# Altium PCB MC_Project.PcbDoc
Units mm, origin at the board's own origin, x right, y up, seen from the top; angles counter-clockwise.
Board outline 36.07 x 40.64 mm, 2 copper layers (Top Layer, Bottom Layer); 32 components, 44 nets, 160 pads, 46 vias.
Unrouted connection lines stored in the file: 19.
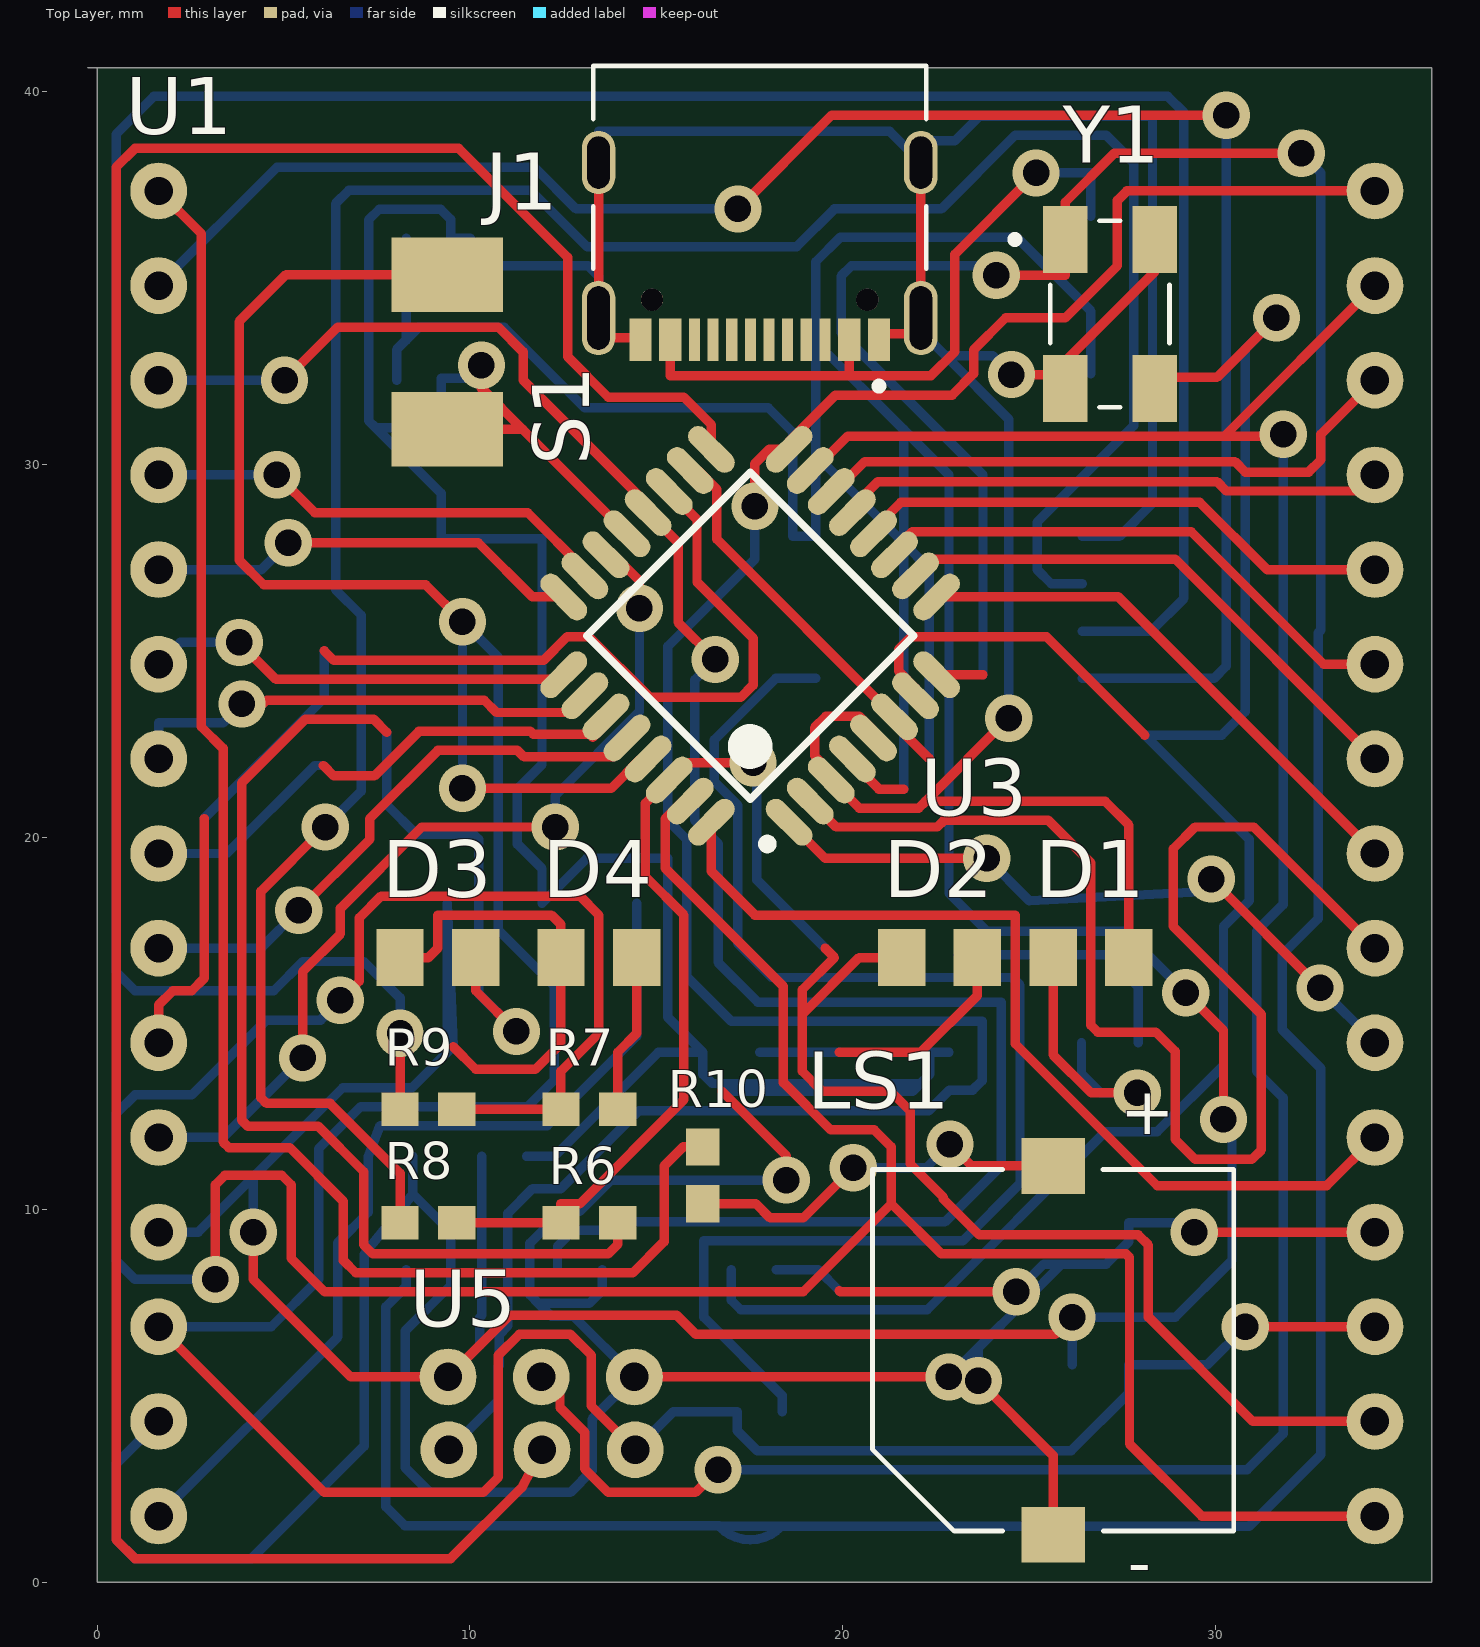
[diagram p0: Top Layer view]
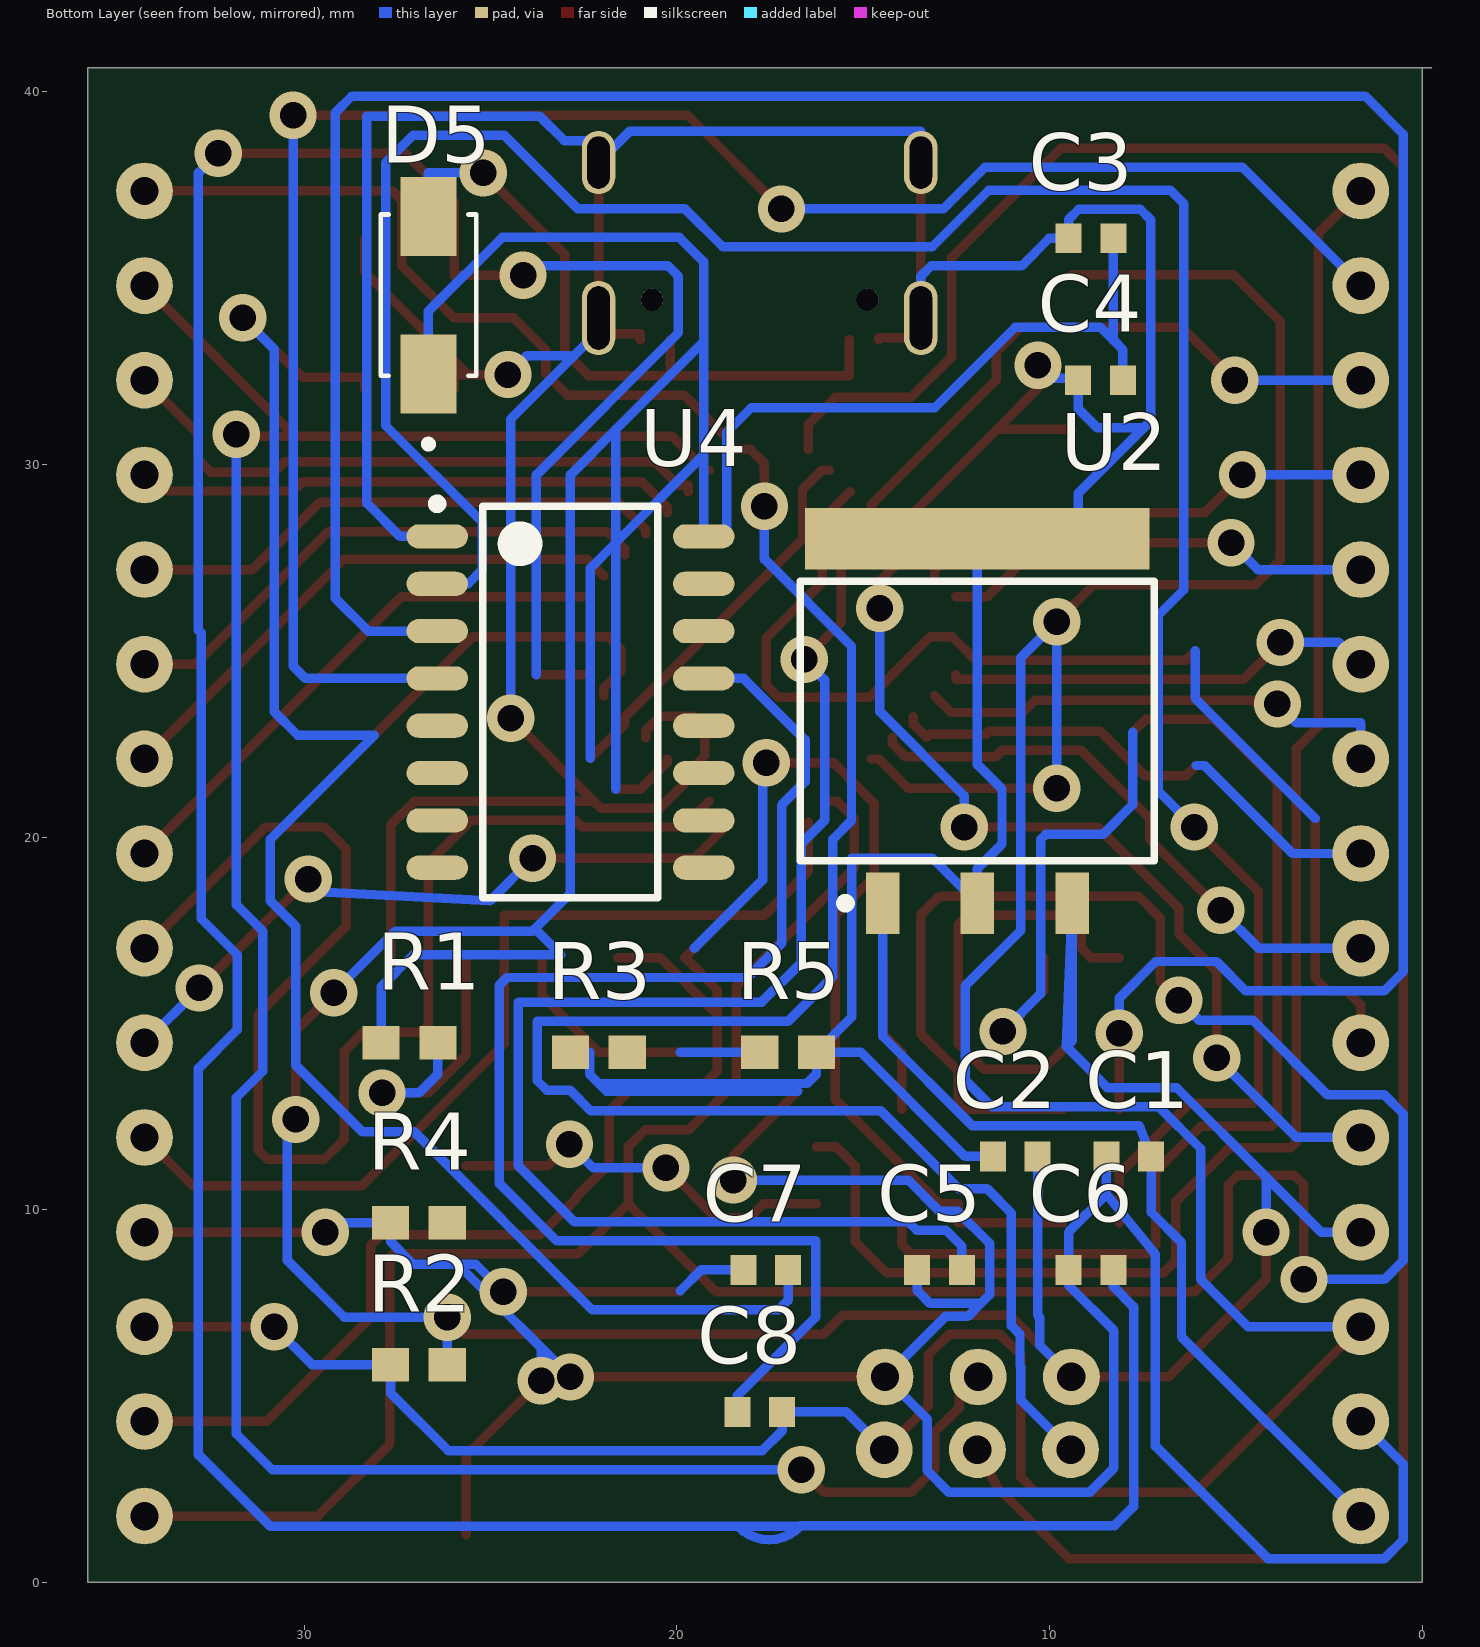
[diagram p1: Bottom Layer view, seen from below]

## Layer stack, top to bottom
Top Solder: solder mask 0.0102, Solder Resist, Dk 3.5
Top Layer: signal copper 0.0356
Dielectric 1: dielectric 0.32, FR-4, Dk 4.8
Bottom Layer: signal copper 0.0356
Bottom Solder: solder mask 0.0102, Solder Resist, Dk 3.5

## Board outline
-0.254,40.64 0,40.64 0,0 35.814,0 35.814,40.64

## Design rules (kind name [scope] priority, off if disabled: settings)
Clearance [All] p1: gap=0.254 ignorepadtopadclearanceinfootprint=FALSE
PolygonConnect [All] p1: connectstyle=Relief reliefconductorwidth=0.254 reliefentries=4 polygonreliefangle="90 Angle" airgapwidth=0.254
RoutingVias [All] p1: holewidth=0.711 width=1.27 viastyle="Through Hole" minholewidth=0.711 minwidth=1.27 maxholewidth=0.711 maxwidth=1.27
SolderMaskExpansion [All] p1: expansion=0.102 istentingtop=FALSE
SupplyNets "Schematic Supply Nets_4" [InNet('GND')] p1: voltage=0.000
SupplyNets "Schematic Supply Nets_3" [InNet('VCC')] p2: voltage=0.000
SupplyNets "Schematic Supply Nets_2" [InNet('+3V3')] p3: voltage=0.000
SupplyNets "Schematic Supply Nets_1" [InNet('VBUS')] p4: voltage=0.000
SupplyNets "Schematic Supply Nets" [InNet('+5')] p5: voltage=0.000
Width [All] p1: maxlimit=0.254 minlimit=0.254 preferedwidth=0.254
30 further rules are at their usual default settings.

## Components (designator, comment, footprint, x,y, rotation, side; value= is the part's Value field where it differs from the comment)
C1 "Cap0402" CAPC1005X06N 7.874,11.43 r180 bottom locked value=1uF
C2 "Cap0402" CAPC1005X06N 10.922,11.43 r180 bottom locked value=1uF
C3 "Cap0402" CAPC1005X06N 8.89,36.068 r180 bottom locked value=1uF
C4 "Cap0402" CAPC1005X06N 8.636,32.258 r180 bottom locked value=4.7uF
C5 "Cap0402" CAPC1005X06N 12.954,8.382 r180 bottom locked value=100nF
C6 "Cap0402" CAPC1005X06N 8.89,8.382 r180 bottom locked value=22pF
C7 "Cap0402" CAPC1005X06N 17.618,8.382 r180 bottom locked value=22pF
C8 "Cap0402" CAPC1005X06N 17.78,4.572 r180 bottom locked
D1 "LED0805" Led 26.67,16.764 r0 top locked
D2 "LED0805" Led 22.606,16.764 r0 top locked
D3 "LED0805" Led 9.144,16.764 r0 top locked
D4 "LED0805" Led 13.462,16.764 r0 top locked
D5 "1SMA5926" DIOM4325X250N 26.67,34.544 r90 bottom locked
J1 "TYPE-C-31-M-12" HRO_TYPE-C-31-M-12 17.78,38.1 r180 top locked
LS1 "CMI-9705-0380-SMT-TR" CUI_CMI-9705-0380-SMT-TR 25.654,6.226 r0 top
R1 "Resistance-0603" RESC1508X03N 27.178,14.478 r180 bottom locked value=220Ω
R2 "Resistance-0603" RESC1508X03N 26.924,5.842 r180 bottom locked value=10KΩ
R3 "Resistance-0603" RESC1508X03N 22.098,14.224 r180 bottom locked value=5.1kΩ
R4 "Resistance-0603" RESC1508X03N 26.924,9.652 r180 bottom locked value=5.1kΩ
R5 "Resistance-0603" RESC1508X03N 17.018,14.224 r180 bottom locked value=220Ω
R6 "Resistance-0603" RESC1508X03N 13.208,9.652 r0 top locked value=10KΩ
R7 "Resistance-0603" RESC1508X03N 13.208,12.7 r0 top locked value=10KΩ
R8 "Resistance-0603" RESC1508X03N 8.89,9.652 r0 top locked value=1KΩ
R9 "Resistance-0603" RESC1508X03N 8.89,12.7 r0 top locked value=1KΩ
R10 "Resistance-0603" RESC1508X03N 16.256,10.922 r90 top locked value=220Ω
S1 "Switch" "Switch - duplicate" 9.398,33.02 r90 top locked
U1 "PinHeader" PCBComponent_1 1.651,1.778 r0 top locked
U2 "LM7805" LM7805-SOT223 11.938,23.114 r90 bottom locked
U3 "ATMEGA328P-AU" ATMEGA328P-AU 17.526,25.4 r135 top locked
U4 "CH340c" CH340c 22.86,23.622 r180 bottom locked
U5 "ICSP_PinHeader" "Edge Connector" 9.438,3.556 r0 top locked
Y1 "ABM3B-16.000MHZ-B2-T" XTAL_ABM3B-16.000MHZ-B2-T 27.178,34.036 r0 top locked

## Footprints (in the part's own frame and the unit in brackets; to place one, negate y for a bottom-side part, rotate by r counter-clockwise, add the part's x,y. Pads: shape width x height; smd on the part's side, far side on the other; paste and mask are expansions set on the pad)
ATMEGA328P-AU [mm] "TQFP, 32-Leads, Body 7.00x7.00mm, Pitch 0.80mm, IPC Medium Density"
  oval 1.55x0.55 smd: 1(-4.275,2.8) 2(-4.275,2) 3(-4.275,1.2) 4(-4.275,0.4) 5(-4.275,-0.4) 6(-4.275,-1.2) 7(-4.275,-2) 8(-4.275,-2.8) 17(4.275,-2.8) 18(4.275,-2) 19(4.275,-1.2) 20(4.275,-0.4) 21(4.275,0.4) 22(4.275,1.2) 23(4.275,2) 24(4.275,2.8)
  oval 0.55x1.55 smd: 9(-2.8,-4.275) 10(-2,-4.275) 11(-1.2,-4.275) 12(-0.4,-4.275) 13(0.4,-4.275) 14(1.2,-4.275) 15(2,-4.275) 16(2.8,-4.275) 25(2.8,4.275) 26(2,4.275) 27(1.2,4.275) 28(0.4,4.275) 29(-0.4,4.275) 30(-1.2,4.275) 31(-2,4.275) 32(-2.8,4.275)
  silkscreen extent -4.4,-3.1 3.1,3.75, body extent -4.5,-4.62 4.5,4.62, height 1.2
CAPC1005X06N [mm] "Chip Capacitor, 2-Leads, Body 1.02x0.51mm, IPC Medium Density"
  rect 0.7x0.8 smd: 1(-0.6,0) 2(0.6,0)
  body extent -0.56,-0.31 0.56,0.31, height 0.61
CH340c [mm] "SOP, 16-Leads, Body 10.30x5.30mm, Pitch 1.27mm, IPC Medium Density"
  oval 1.65x0.65 smd: 1(-3.575,4.445) 2(-3.575,3.175) 3(-3.575,1.905) 4(-3.575,0.635) 5(-3.575,-0.635) 6(-3.575,-1.905) 7(-3.575,-3.175) 8(-3.575,-4.445) 9(3.575,-4.445) 10(3.575,-3.175) 11(3.575,-1.905) 12(3.575,-0.635) 13(3.575,0.635) 14(3.575,1.905) 15(3.575,3.175) 16(3.575,4.445)
  silkscreen extent -3.7,-5.25 2.35,5.44, body extent -3.9,-5.25 3.9,5.25, height 1.9
CUI_CMI-9705-0380-SMT-TR [mm]
  rect 1.7x1.5 smd: 32(0,4.95) N(0,-4.95)
  silkscreen extent -4.85,-4.85 4.85,4.85
DIOM4325X250N [mm]
  rect 2.12x1.5 smd: A(2.115,0) C(-2.115,0)
  silkscreen extent -4.1,-1.28 2.16,1.28, body extent -2.57,-1.28 2.57,1.28, height 2.5
"Edge Connector" [mil]
  round 60 hole 30: 1(0,0) 2(98.43,0) 3(196.85,0) 4(196,77) 5(97.58,77) 6(-0.85,77)
  body extent -39,-43 234,116, height 185
HRO_TYPE-C-31-M-12 [mm]
  rect 0.6x1.14 smd mask+0.05: A1_B12(-3.2,4.75) A4_B9(-2.4,4.75) B1_A12(3.2,4.75) B4_A9(2.4,4.75)
  rect 0.3x1.14 smd mask+0.05: A5(-1.25,4.75) A6(-0.25,4.75) A7(0.25,4.75) A8(1.25,4.75) B5(1.75,4.75) B6(0.75,4.75) B7(-0.75,4.75) B8(-1.75,4.75)
  oval 0.9x2 hole 0.6 slot 1.7 at 90 deg: S1(-4.325,4.17) S2(4.325,4.17)
  oval 0.9x1.7 hole 0.6 slot 1.4 at 90 deg: S3(-4.325,0) S4(4.325,0)
  round 0.6 hole 0.6 unplated: ""(-2.89,3.68) ""(2.89,3.68)
  silkscreen extent -4.47,-2.6 4.47,6.1, body extent -4.47,-2.6 4.47,5.31, height 3.31
Led [mil]
  rect 50x60 smd: A(-40,0) K(40,0)
  body extent -39,-25 39,25, height 28
LM7805-SOT223 [mm] "SOT223, 4-Leads, Body 9.40x10.54mm (avg), Pitch 2.54mm, IPC Medium Density"
  rect 1.65x0.9 smd: 1(-4.89,2.54) 2(-4.89,0) 3(-4.89,-2.54)
  rect 1.65x9.25 smd: 4(4.89,0)
  silkscreen extent -5.01,-4.75 3.75,4.75, body extent -5.27,-4.76 5.27,4.76, height 2.03
PCBComponent_1 [mil]
  round 60 hole 30: +3V3(0,1300) +5V(0,300) A6(0,500) A7(0,400) AREF(0,1200) D0/RX(1285,100) D1/TX(1285,0) D2(1285,400) D4(1285,600) D7(1285,900) D8(1285,1000) D12(1285,1400) D13(0,1400) D14(0,1100) D15(0,1000) D16(0,900) D17(0,800) D18(0,700) D19(0,600) GND(0,100) GROUND(1285,300) RESET(1285,200) RST(0,200) VIN(0,0) ~D3(1285,500) ~D5(1285,700) ~D6(1285,800) ~D9(1285,1100) ~D10(1285,1200) ~D11(1285,1300)
  body extent -50,-55 1335,1450, height 370
RESC1508X03N [mm] "Chip Resistor, 2-Leads, Body 1.55x0.80mm, IPC Medium Density"
  rect 1x0.9 smd: 1(-0.762,0) 2(0.762,0)
  body extent -0.82,-0.45 0.82,0.45, height 0.3
"Switch - duplicate" [mm]
  rect 2x3 smd: 1(-2.075,0) 2(2.075,0)
  body extent -2.3,-1.6 2.3,1.6, height 2.5
XTAL_ABM3B-16.000MHZ-B2-T [mm]
  rect 1.2x1.8 smd: 1(-1.2,2) 2(-1.2,-2) 3(1.2,-2) 4(1.2,2)
  silkscreen extent -2.65,-2.5 1.6,2.5, body extent -1.6,-2.5 1.6,2.5, height 1.1

## Part data
C1 C2 C3 C4 C5 C6 C7 C8: Manufacturer="Murata Electronics", Manufacturer Part Number=GRM155R71C104KA88J, Supplier Part Number=490-6328-2-ND, Supplier=DigiKey
D1 D2 D3 D4: Manufacturer="Würth Elektronik", Manufacturer Part Number=150080BS75000, Supplier Part Number=732-4982-2-ND, Supplier=DigiKey
D5: "DO-214AC (SMA), 1500mW, 5%, Zener Diode", Package="SMA-2 Taiwan Semiconductor", Availability="In Stock", Check_prices=https://www.snapeda.com/parts/1SMA5926/Taiwan+Semiconductor/view-part/?ref=eda, MF="Taiwan Semiconductor", MP=1SMA5926, Price=None, Purchase-URL=https://pricing.snapeda.com/search/part/1SMA5926/?ref=eda, SnapEDA_Link=https://www.snapeda.com/parts/1SMA5926/Taiwan+Semiconductor/view-part/?ref=snap
J1: "USB Connectors 24 Receptacle 1 8.94*7.3mm RoHS", Package=Package, Availability="Not in stock", Check_prices=https://www.snapeda.com/parts/TYPE-C-31-M-12/HRO+Electronics+Co.%252C+Ltd./view-part/?ref=eda, MF="HRO Electronics Co., Ltd.", MP=TYPE-C-31-M-12, Price=None, SnapEDA_Link=https://www.snapeda.com/parts/TYPE-C-31-M-12/HRO+Electronics+Co.%252C+Ltd./view-part/?ref=snap
LS1: "9.7 mm, 3 Vdc, 80 dB, Surface Mount, Driving Circuit, Magnetic Audio Indicator Buzzer", Package="CUI Inc.", Check_prices=https://www.snapeda.com/parts/CMI-9705-0380-SMT-TR/CUI+Devices/view-part/?ref=eda, CUI_purchase_URL=https://www.cuidevices.com/product/audio/buzzers/audio-indicators/cmi-9705-0380-smt-tr?utm_source=snapeda.com&utm_medium=referral&utm_campaign=snapedaBOM, Digi-Key_Part_Number=102-CMI-9705-0380-SMT-TR-ND, MF="CUI Devices", MP=CMI-9705-0380-SMT-TR, Purchase-URL=https://pricing.snapeda.com/search/part/CMI-9705-0380-SMT-TR/?ref=eda, SnapEDA_Link=https://www.snapeda.com/parts/CMI-9705-0380-SMT-TR/CUI+Devices/view-part/?ref=snap
R1 R2 R3 R4 R5 R6 R7 R8 R9 R10: Manufacturer=YAGEO, Manufacturer Part Number=RC0603FR-0710KL, Supplier Part Number=311-10.0KHRTR-ND, Supplier=DigiKey
S1: Manufacturer="Alps Alpine", Manufacturer Part Number=SKRPACE010, Suplier=DigiKey, Suplier Part  Number=4809-SKRPACE010TR-ND
U2: "5V, 1.5A linear voltage regulator with thermal and short-circuit protection. Requires 7V-35V input, typical dropout voltage of 2V.", Manufacturer="Texas Instruments", Manufacturer Part Number=LM7805/NOPB, Supplier Part Number=LM7805MP/NOPB-ND, Supplier=Digikey
U3: "8-bit microcontroller with 32KB Flash, 2KB SRAM, and 23 I/O pins, operating at up to 20MHz in a TQFP-32 package. Ideal for embedded applications.", Manufacturer="Microchip Technology", Supplier Part Number=ATMEGA328P-AU-ND, ComponentLink1Description="Data Sheet", ComponentLink1URL=https://ww1.microchip.com/downloads/aemDocuments/documents/MCU08/ProductDocuments/DataSheets/Atmel-7810-Automotive-Microcontrollers-ATmega328P_Datasheet.pdf, Family=TQFP, Manufacturer Part Number=ATMEGA328P-AU, Supplier=Digikey
U4: "USB-to-serial converter IC with built-in crystal oscillator and power-on reset, simplifying UART, I2C, or SPI communication. Ideal for compact designs requiring USB connectivity.", Manufacturer="WCH(Jiangsu Qin Heng)", Manufacturer Part Number=CH340C-SSOP16, Supplier Part Number=CH340C-ND, Family=SOP-16, Supplier=Digi-Key
U5: Manufacturer="TE Connectivity AMP Connectors", Manufacturer Part Number=4-103321-0, Supplier Part Number=A26520-ND, Supplier=DigiKey
Y1: "16 MHz Â±20ppm Crystal 18pF 50 Ohms 4-SMD, No Lead", Package="SMD-4 Abracon LLC", Availability="In Stock", Check_prices=https://www.snapeda.com/parts/ABM3B-16.000MHZ-B2-T/Abracon+LLC/view-part/?ref=eda, MF=Abracon, MP=ABM3B-16.000MHZ-B2-T, Price=None, Purchase-URL=https://pricing.snapeda.com/search/part/ABM3B-16.000MHZ-B2-T/?ref=eda, SnapEDA_Link=https://www.snapeda.com/parts/ABM3B-16.000MHZ-B2-T/Abracon+LLC/view-part/?ref=snap

## Via types
v1: diameter 1.27, hole 0.711, Top Layer to Bottom Layer, 46 vias

## Nets (pads, with @x,y where several pads share a name; then routed paths per layer and width w, separated by ;. In a path a pad name is that pad's centre, name@x,y a point inside that pad or via, vN(x,y) a via of type N, cw(c..) or ccw(c..) an arc to the next point about the centre after c; other vN are vias at no path point)
+3V3: U1.+3V3 U4.4 | length 50.3
  Top Layer w0.254: v1(17.196,36.855) 19.71,39.37 v1(30.302,39.37)
  Bottom Layer w0.254: U1.+3V3 4.827,37.974 11.734,37.974 12.852,36.855 v1(17.196,36.855) ; U4.4 29.972,24.257 30.302,24.587 v1(30.302,39.37)
+5: C2.2 C3.2 C4.2 D3.A D4.A D5.C R1.1 R2.2 U1.+5V U2.3 U3.4 U3.6 U3.18 U4.16 U5.6 | length 176.1
  Top Layer w0.254: v1(4.191,9.398) 4.191,8.128 6.807,5.512 U5.6 11.067,7.163 15.559,7.163 16.067,6.655 25.705,6.655 v1(26.162,7.112) ; D3.A 8.89,16.764 9.144,17.018 9.144,17.907 12.192,17.907 12.446,17.653 D4.A 12.446,14.453 11.76,13.767 10.16,13.767 9.55,14.376 ; U3.18 16.121,29.837 16.631,29.327 16.631,27.992 U3.6 21.397,23.038 22.327,22.109 ; U3.4 20.266,22 20.98,21.285 21.641,21.285 ; v1(29.21,15.824) 30.226,14.808 v1(30.226,12.421)
  Bottom Layer w0.254: U1.+5V 2.714,9.398 4.191,10.875 ; v1(4.191,9.398) 4.191,10.875 ; C4.2 8.036,33.08 8.29,33.334 ; C3.2 8.29,33.334 ; U5.6 10.265,6.361 10.265,7.106 10.322,7.163 C2.2 ; 21.641,21.285 21.641,27.896 ; 22.327,22.109 22.327,27.21 21.641,27.896 ; R2.2 v1(26.162,7.112) 28.931,7.112 30.455,8.636 30.455,12.192 v1(30.226,12.421) ; D5.C 26.67,34.112 24.689,36.093 19.939,36.093 19.285,35.439 19.285,33.293 ; R1.1 27.94,15.977 27.076,16.84 23.114,16.84 23.812,17.539 ; v1(29.21,15.824) 27.559,17.475 23.876,17.475 23.812,17.539 ; 4.191,10.875 6.589,13.273 8.447,13.273 9.55,14.376 ; 8.29,33.334 8.636,33.68 10.922,33.68 13.081,31.521 18.009,31.521 18.669,30.861 18.669,28.067 U4.16 19.285,29.61 19.285,30.251 ; 9.55,14.376 9.398,14.529 U2.3 9.55,14.376 ; 19.285,30.251 21.641,27.896 ; 19.285,30.251 19.285,33.293 ; 19.285,33.293 21.641,30.937 ; 21.641,27.896 21.641,30.937 ; 21.641,30.937 22.86,29.718 22.86,18.491 23.812,17.539
A0: U1.D14 U3.23 | length 12.7
  Top Layer w0.254: v1(4.826,29.718) 5.842,28.702 11.557,28.702 13.089,27.17 U3.23
  Bottom Layer w0.254: U1.D14 v1(4.826,29.718)
A1: U1.D15 U3.24 | length 11.8
  Top Layer w0.254: v1(5.131,27.9) 10.226,27.9 11.682,26.443 U3.24
  Bottom Layer w0.254: U1.D15 4.409,27.178 v1(5.131,27.9)
A2: U1.D16 U3.25 | length 11.6
  Top Layer w0.254: v1(3.81,25.222) 4.801,24.232 12.523,24.232 U3.25
  Bottom Layer w0.254: U1.D16 2.235,25.222 v1(3.81,25.222)
A3: U1.D17 U3.26 | length 13
  Top Layer w0.254: v1(3.886,23.571) 4.445,23.571 4.547,23.673 10.389,23.673 10.719,23.343 12.64,23.343 U3.26
  Bottom Layer w0.254: U1.D17 1.651,23.063 3.378,23.063 v1(3.886,23.571)
A4: U1.D18 U3.27 | length 14
  Top Layer w0.254: 6.071,21.92 6.35,21.641 7.442,21.641 8.636,22.835 11.627,22.835 11.703,22.758 13.225,22.758 13.303,22.681 13.655,23.033 U3.27
  Bottom Layer w0.254: U1.D18 3.48,19.558 5.842,21.92 6.071,21.92
A5: U1.D19 U3.28 | length 15.5
  Top Layer w0.254: v1(5.41,18.034) 7.314,19.938 7.314,20.497 9.144,22.327 11.278,22.327 11.455,22.149 13.865,22.149 14.22,22.504 U3.28
  Bottom Layer w0.254: U1.D19 4.394,17.018 v1(5.41,18.034)
A6: U1.A6 U3.19 | length 31.5
  Top Layer w0.254: U1.A6 1.651,15.494 2.032,15.875 2.54,15.875 2.87,16.205 2.87,20.498 ; 6.096,24.994 6.35,24.74 11.978,24.74 12.613,25.375 13.208,25.375 14.834,23.749 17.272,23.749 17.602,24.079 17.602,25.338 16.098,26.843 16.098,28.526 U3.19
  Bottom Layer w0.254: 2.87,20.498 6.096,23.724 6.096,24.994
A7: U1.A7 U3.22 | length 24.6
  Top Layer w0.254: v1(5.512,14.072) 5.512,16.383 6.528,17.399 6.528,18.085 8.712,20.269 v1(12.294,20.269) ; U3.22 13.858,27.574 14.554,26.878 v1(14.554,26.137)
  Bottom Layer w0.254: U1.A7 3.378,11.938 v1(5.512,14.072) ; v1(12.294,20.269) 12.294,21.107 14.554,23.368 v1(14.554,26.137)
AREF: C5.2 U1.AREF U3.20 | length 55.5
  Top Layer w0.254: v1(5.029,32.258) 6.452,33.68 10.77,33.68 11.43,33.02 11.43,32.265 14.786,28.909 U3.20 15.59,27.902 15.59,25.762 v1(16.586,24.765)
  Bottom Layer w0.254: U1.AREF v1(5.029,32.258) ; C5.2 12.354,9.017 12.783,9.446 13.567,9.446 13.792,9.671 22.752,9.671 24.257,11.176 24.257,15.57 17.729,15.57 16.662,16.637 16.662,19.823 16.039,20.447 16.039,24.218 v1(16.586,24.765)
CC2: J1.B5 R4.2
D0/RX: D2.A R6.1 R8.2 U1.D0/RX U3.30 | length 53.6
  Top Layer w0.254: R8.2 R6.1 12.446,10.16 12.954,10.16 15.748,12.954 15.748,17.907 14.707,18.948 14.707,20.904 U3.30@15.352,21.549 ; U3.30 U3.30@15.352,21.549 ; v1(17.602,21.996) 15.799,21.996 U3.30@15.352,21.549 ; 19.533,17.018 19.787,16.764 18.923,15.9 18.923,15.24 ; D2.A 20.447,16.764 18.923,15.24 ; U1.D0/RX 31.013,4.318 28.212,7.119 28.212,9.05 27.94,9.322 23.673,9.322 22.708,10.287 22.708,10.338 21.819,11.227 21.819,12.649 21.285,13.183 19.456,13.183 18.923,13.716 18.923,15.24
  Bottom Layer w0.254: v1(17.602,21.996) 17.704,21.946 17.704,18.847 19.533,17.018
D1/TX: R7.1 R9.2 U1.D1/TX U3.31 | length 89.8
  Top Layer w0.254: v1(3.175,8.128) 3.175,10.668 3.429,10.922 4.953,10.922 5.207,10.668 5.207,8.693 6.102,7.798 18.948,7.798 21.311,10.16 ; v1(6.528,15.621) 7.036,16.129 7.036,17.831 7.62,18.415 12.954,18.415 13.462,17.907 13.462,14.732 12.446,13.716 R7.1 R9.2 ; U3.31 15.714,20.963 15.24,20.489 15.24,19.168 18.415,15.993 18.415,13.411 19.685,12.141 20.853,12.141 21.311,11.684 21.311,10.16 ; U1.D1/TX 29.642,1.778 27.704,3.716 27.704,8.719 27.61,8.814 22.657,8.814 21.311,10.16
  Bottom Layer w0.254: v1(3.175,8.128) 1.016,8.128 0.508,8.636 0.508,12.573 1.016,13.081 2.54,13.081 4.547,15.088 5.994,15.088 v1(6.528,15.621)
D2: U1.D2 U3.32 | length 25.2
  Top Layer w0.254: U3.32 16.483,19.077 17.653,17.907 24.638,17.907 24.638,14.453 28.448,10.643 32.995,10.643 U1.D2
D3: U1.~D3 U3.1 | length 18.8
  Top Layer w0.254: U3.1 19.535,19.431 v1(23.876,19.431) ; v1(29.896,18.872) v1(32.817,15.951)
  Bottom Layer w0.254: v1(23.876,19.431) 25.019,18.288 29.896,18.542 v1(29.896,18.872) ; v1(32.817,15.951) U1.~D3
D4: U1.D4 U3.2 | length 36.3
  Top Layer w0.254: U3.2 19.828,20.269 22.545,20.269 22.723,20.447 25.527,20.447 26.67,19.304 26.67,14.948 26.85,14.767 28.41,14.767 28.931,14.247 28.931,11.885 29.464,11.351 30.988,11.351 31.242,11.605 31.242,15.24 28.88,17.602 28.88,19.685 29.464,20.269 31.039,20.269 U1.D4
D5: U1.~D5 U3.9 | length 14.6
  Top Layer w0.254: U3.9 27.405,26.443 U1.~D5
D6: U1.~D6 U3.10 | length 14.7
  Top Layer w0.254: U3.10 22.412,27.457 28.931,27.457 U1.~D6
D7: U1.D7 U3.11 | length 14.7
  Top Layer w0.254: U3.11 21.397,27.722 21.869,28.194 29.362,28.194 32.918,24.638 U1.D7
D8: U1.D8 U3.12 | length 14.6
  Top Layer w0.254: U3.12 20.832,28.249 21.565,28.981 29.591,28.981 31.394,27.178 U1.D8
D9: U1.~D9 U3.13 | length 14.7
  Top Layer w0.254: U3.13 20.266,28.851 20.955,29.54 30.048,29.54 30.302,29.286 33.858,29.286 U1.~D9
D10: U1.~D10 U3.14 | length 16.6
  Top Layer w0.254: U3.14 19.7,29.439 19.964,29.439 20.599,30.074 30.531,30.074 30.81,29.794 32.512,29.794 32.842,30.124 32.842,30.81 U1.~D10
D11/MOSI: U1.~D11 U3.15 U5.5 | length 69.2
  Top Layer w0.254: U5.5 12.421,5.512 12.421,4.69 13.081,4.029 13.081,3.048 13.716,2.413 16.053,2.413 v1(16.662,3.023) ; U3.15 19.22,29.837 20.138,30.755 30.247,30.755 ; v1(31.826,30.81) 31.826,30.755 30.247,30.755 ; U1.~D11 30.247,30.755
  Bottom Layer w0.254: v1(16.662,3.023) 30.861,3.023 31.826,3.988 31.826,13.005 31.115,13.716 31.115,17.475 31.826,18.186 v1(31.826,30.81)
D12/MISO: U1.D12 U3.16 U5.1 | length 67.4
  Top Layer w0.254: v1(17.653,28.88) 17.653,30.022 18.034,30.403 U3.16 18.569,30.618 19.812,31.861 22.945,31.861 23.52,32.436 23.52,33.071 24.384,33.934 25.984,33.934 27.381,35.331 27.381,37.084 27.635,37.338 U1.D12
  Bottom Layer w0.254: U5.1 10.77,4.888 10.77,5.791 10.795,5.817 10.795,6.655 11.024,6.883 11.024,9.906 11.684,10.566 12.446,10.566 14.529,12.649 22.312,12.649 22.871,13.208 23.495,13.208 23.749,13.462 23.749,15.062 17.011,15.062 15.817,16.256 15.817,19.939 15.316,20.44 15.316,25.121 17.653,27.457 v1(17.653,28.88)
D13: R10.2 U1.D13 | length 44.1
  Top Layer w0.254: U1.D13 2.794,36.195 2.794,22.962 3.378,22.377 3.378,11.817 3.531,11.665 5.169,11.665 6.61,10.224 6.61,8.636 6.941,8.306 14.376,8.306 15.215,9.144 15.215,11.176 15.723,11.684 R10.2
D13/SCK: U3.17 U5.2 | length 71.3
  Top Layer w0.254: U5.2 11.392,2.54 9.487,0.635 1.016,0.635 0.508,1.143 0.508,37.973 1.016,38.481 9.703,38.481 12.624,35.56 12.624,32.893 13.716,31.801 15.748,31.801 16.483,31.066 U3.17
DIFF_N: J1.A7 J1.B7 U4.6
DIFF_P: J1.A6 J1.B6 U4.5
GND: C1.1 C2.1 C3.1 C4.1 C5.1 C6.1 C7.1 D1.K J1.A1_B12 J1.B1_A12 J1.S1 J1.S2 J1.S3 J1.S4 LS1.N R3.1 R4.1 R5.2 S1.1 U1.GND U1.GROUND U2.2 U2.4 U3.3 U3.5 U3.21 U4.1 U5.4 Y1.2 Y1.4 | length 243.4
  Top Layer w0.254: S1.1 11.415,30.945 ; v1(10.312,32.664) 10.312,32.048 11.415,30.945 ; J1.S4 J1.S2 13.455,33.401 14.58,33.401 J1.B1_A12 ; U3.21 11.415,30.945 ; U5.4 v1(22.86,5.512) ; 16.764,13.179 18.491,11.452 v1(18.491,10.795) ; 19.914,7.823 19.939,7.798 v1(24.663,7.798) ; U3.5 20.832,22.864 20.454,23.241 19.558,23.241 19.253,22.936 19.253,22.179 19.7,21.732 U3.3 20.452,20.777 22.047,20.777 22.225,20.955 ; J1.A1_B12 20.98,33.503 22.105,33.503 J1.S1 J1.S3 ; v1(23.647,5.41) 25.654,3.404 LS1.N ; v1(24.46,23.19) 22.225,20.955 ; v1(24.536,32.41) Y1.2@25.622,32.41 ; Y1.2 25.978,32.41 Y1.2@25.622,32.41 ; D1.K 27.686,20.32 27.051,20.955 22.225,20.955 ; Y1.4 28.378,35.166 Y1.2@25.622,32.41 ; v1(29.439,9.398) U1.GROUND
  Bottom Layer w0.254: U1.GND 0.508,3.175 0.508,1.143 1.016,0.635 4.14,0.635 7.163,3.658 7.163,8.81 8.474,10.414 ; C1.1 8.474,10.414 ; v1(10.312,32.664) 9.957,32.309 9.236,32.309 C4.1 9.236,31.496 8.728,30.988 7.47,30.988 ; C2.1 12.268,11.43 15.062,14.224 R5.2 ; J1.S2 13.455,35.052 13.176,35.331 10.744,35.331 10.008,36.068 C3.1 9.49,36.576 9.217,36.849 7.569,36.849 7.29,36.57 7.29,31.169 7.47,30.988 ; J1.S4 13.455,38.935 21.27,38.935 J1.S3 22.105,38.684 23.02,38.684 23.685,39.349 28.317,39.349 28.321,39.345 28.321,28.956 27.432,28.067 U4.1 ; C5.1 13.554,7.829 13.208,7.483 11.846,7.483 ; 16.764,13.179 21.891,13.179 22.098,13.386 ; C7.1 19.355,8.382 19.914,7.823 ; v1(18.491,10.795) 13.792,10.795 12.951,9.954 12.469,9.954 11.608,9.093 11.608,7.722 11.846,7.483 ; J1.S1 22.105,33.572 22.758,32.918 ; v1(22.86,5.512) 23.647,6.299 ; R3.1 22.343,14.224 22.343,13.63 22.098,13.386 ; v1(23.647,5.41) 23.647,6.299 ; v1(24.46,23.19) 24.46,31.217 22.758,32.918 ; v1(24.536,32.41) 24.028,32.918 22.758,32.918 ; v1(24.663,7.798) 25.4,8.534 25.883,8.534 ; v1(29.439,9.398) 29.185,9.652 R4.1 27.686,9.144 27.076,8.534 25.883,8.534 ; 7.47,30.988 9.236,29.222 9.236,28.004 U2.4 11.938,21.946 11.278,21.285 11.278,19.812 11.938,19.152 U2.2 13.145,19.431 15.309,19.431 15.309,15.171 R5.2 ; 8.474,10.414 9.49,9.398 C6.1 9.49,7.973 8.273,6.756 8.273,3.07 8.93,2.413 12.7,2.413 13.284,2.997 13.284,4.38 U5.4 12.791,7.137 12.192,7.137 11.846,7.483 ; R5.2 16.256,13.64 16.51,13.386 22.098,13.386 ; 23.647,6.299 24.905,7.556 25.883,8.534
NetC6_2: C6.2 U3.8 Y1.1 | length 99.2
  Top Layer w0.254: U3.8 23.773,24.357 ; v1(24.13,35.077) 25.978,35.077 Y1.1 25.978,37.033 27.299,38.354 v1(32.309,38.354)
  Bottom Layer w0.254: C6.2 8.29,7.934 7.747,7.391 7.747,2.032 8.255,1.524 16.692,1.524 16.692,1.504 ; 18.36,1.504 cw(c17.526,2.286) 18.355,1.499 ; 23.773,24.357 23.773,29.72 19.964,33.528 19.964,35.052 20.244,35.331 23.876,35.331 v1(24.13,35.077) ; v1(32.309,38.354) 32.842,37.821 32.842,25.552 32.766,25.476 32.766,17.805 31.801,16.84 31.801,14.834 32.842,13.792 32.842,3.429 30.912,1.499 18.355,1.499 ; 16.692,1.504 ccw(c17.526,2.286) 16.697,1.499 ; 16.692,1.504 16.692,1.499 16.697,1.499 ; 16.697,1.499 ccw(c17.526,2.286) 18.355,1.499 ; 16.697,1.499 18.355,1.499
NetC7_2: C7.2 U3.7 Y1.3 | length 54.5
  Top Layer w0.254: U3.7 21.963,23.995 21.514,24.444 21.514,25.044 21.844,25.375 25.476,25.375 28.118,22.733 ; Y1.3 28.378,32.334 30.048,32.334 v1(31.648,33.934)
  Bottom Layer w0.254: C7.2 17.018,7.569 17.272,7.315 22.276,7.315 27.056,12.095 28.448,12.095 30.226,13.873 30.226,17.602 30.912,18.288 30.912,19.939 28.118,22.733 30.175,22.733 30.81,23.368 30.81,33.096 v1(31.648,33.934)
NetC8_1: C8.1 U4.13 | length 37.1
  Bottom Layer w0.254: C8.1 18.38,5.013 16.281,7.112 16.281,9.163 23.228,9.163 24.765,10.7 24.765,16.027 24.562,16.231 18.105,16.231 17.191,17.145 17.191,20.858 16.561,21.488 16.561,22.606 18.212,24.257 U4.13
NetD1_A: D1.A R1.2 | length 7.8
  Top Layer w0.254: D1.A 25.654,14.155 26.677,13.132 v1(27.915,13.132)
  Bottom Layer w0.254: R1.2 26.416,13.64 26.924,13.132 v1(27.915,13.132)
NetD2_K: D2.K R5.1 | length 7.5
  Top Layer w0.254: 19.914,14.224 22.098,14.224 23.622,15.748 D2.K
  Bottom Layer w0.254: R5.1 19.914,14.224
NetD3_K: D3.K R6.2 | length 40
  Top Layer w0.254: 7.772,22.809 7.417,23.165 5.588,23.165 3.886,21.463 3.886,12.397 4.039,12.245 5.93,12.245 7.156,11.019 7.156,9.054 7.396,8.814 13.716,8.814 13.97,9.068 R6.2 ; D3.K 10.16,15.875 v1(11.252,14.783)
  Bottom Layer w0.254: 7.772,22.809 7.772,20.866 8.566,20.072 10.103,20.072 10.236,19.939 10.236,15.799 v1(11.252,14.783)
NetD4_K: D4.K R7.2 | length 4.3
  Top Layer w0.254: R7.2 13.97,14.224 14.478,14.732 D4.K
NetJ1_A5: J1.A5 R3.2
NetLS1_P: LS1.32 R10.1 | length 10.6
  Top Layer w0.254: R10.1 17.678,10.16 18.059,9.779 18.948,9.779 v1(20.295,11.125) ; v1(22.885,11.76) 23.47,11.176 LS1.32
  Bottom Layer w0.254: v1(20.295,11.125) 22.25,11.125 v1(22.885,11.76)
NetR8_1: R8.1 U4.2 | length 68.4
  Top Layer w0.254: v1(6.121,20.269) 4.394,18.542 4.394,13.003 4.547,12.851 6.25,12.851 8.128,10.973 R8.1
  Bottom Layer w0.254: v1(6.121,20.269) 7.087,21.234 7.087,25.952 6.401,26.638 6.401,37 6.758,37.357 11.632,37.357 13.15,35.839 18.771,35.839 19.787,36.855 22.657,36.855 24.638,38.837 27.076,38.837 27.813,38.1 27.813,31.039 25.222,28.448 25.222,27.178 25.603,26.797 U4.2
NetR9_1: R9.1 U4.3 | length 79.4
  Top Layer w0.254: R9.1 v1(8.128,14.732)
  Bottom Layer w0.254: v1(8.128,14.732) 8.128,15.684 7.152,16.66 5.524,16.66 4.739,15.875 1.016,15.875 0.508,16.383 0.508,38.862 1.524,39.878 28.727,39.878 29.165,39.44 29.165,26.406 28.286,25.527 U4.3
RST: C8.2 R2.1 S1.2 U1.RESET U1.RST U3.29 U5.3 | length 100.9
  Top Layer w0.254: U1.RST 6.096,2.413 10.363,2.413 10.77,2.819 10.77,6.096 11.328,6.655 12.7,6.655 13.259,6.096 13.259,4.735 U5.3 ; S1.2 5.072,35.095 3.81,33.833 3.81,27.432 4.47,26.772 8.814,26.772 v1(9.804,25.781) ; v1(9.804,21.311) 13.799,21.311 14.582,22.094 U3.29 ; v1(30.81,6.858) U1.RESET
  Bottom Layer w0.254: U1.RST 4.674,6.858 5.944,8.128 5.944,11.633 7.076,12.765 11.557,12.765 12.268,13.477 12.268,16.002 10.77,17.501 10.77,24.816 v1(9.804,25.781) v1(9.804,21.311) ; U5.3 15.454,4.572 C8.2 17.18,4.064 17.711,3.533 26.139,3.533 27.686,5.08 R2.1 29.794,5.842 v1(30.81,6.858)
VBUS: D5.A J1.A4_B9 J1.B4_A9 | length 18.2
  Top Layer w0.254: J1.B4_A9 15.38,32.385 20.18,32.385 ; J1.A4_B9 20.18,32.385 ; v1(25.197,37.821) 23.012,35.636 23.012,33.02 22.377,32.385 20.18,32.385
  Bottom Layer w0.254: v1(25.197,37.821) 26.67,37.821 D5.A
VCC: C1.2 U1.VIN U2.1 | length 24.3
  Bottom Layer w0.254: U1.VIN 6.46,6.587 6.46,9.117 7.274,9.931 C1.2 7.593,12.257 12.08,12.257 14.478,14.656 U2.1
pads on no net: J1. J1.A8 J1.B8 U4.7 U4.8 U4.9 U4.10 U4.11 U4.12 U4.14 U4.15

## Silkscreen, mask and mechanical layers (free items; w line width, h text height)
Mechanical 1:
  the board outline again, w0.254

## Text inside footprints (layer, text, board x,y; h text height)
J1: Mechanical 13 "PCB EDGE" at 12.58,40 h0.61 r180
LS1: Top Overlay "+" at 27.454,12.026 h1.27; Top Overlay "-" at 27.654,-0.074 h1.27; Mechanical 13 "+" at 27.454,12.026 h1.27; Mechanical 13 "-" at 27.654,-0.074 h1.27